# Altium PCB main.PcbDoc
Units mil, origin at the board's own origin, x right, y up, seen from the top; angles counter-clockwise.
Board outline 2845.7 x 1927.04 mil, 2 copper layers (Top Layer, Bottom Layer); 12 components, 7 nets, 37 pads, 138 vias.
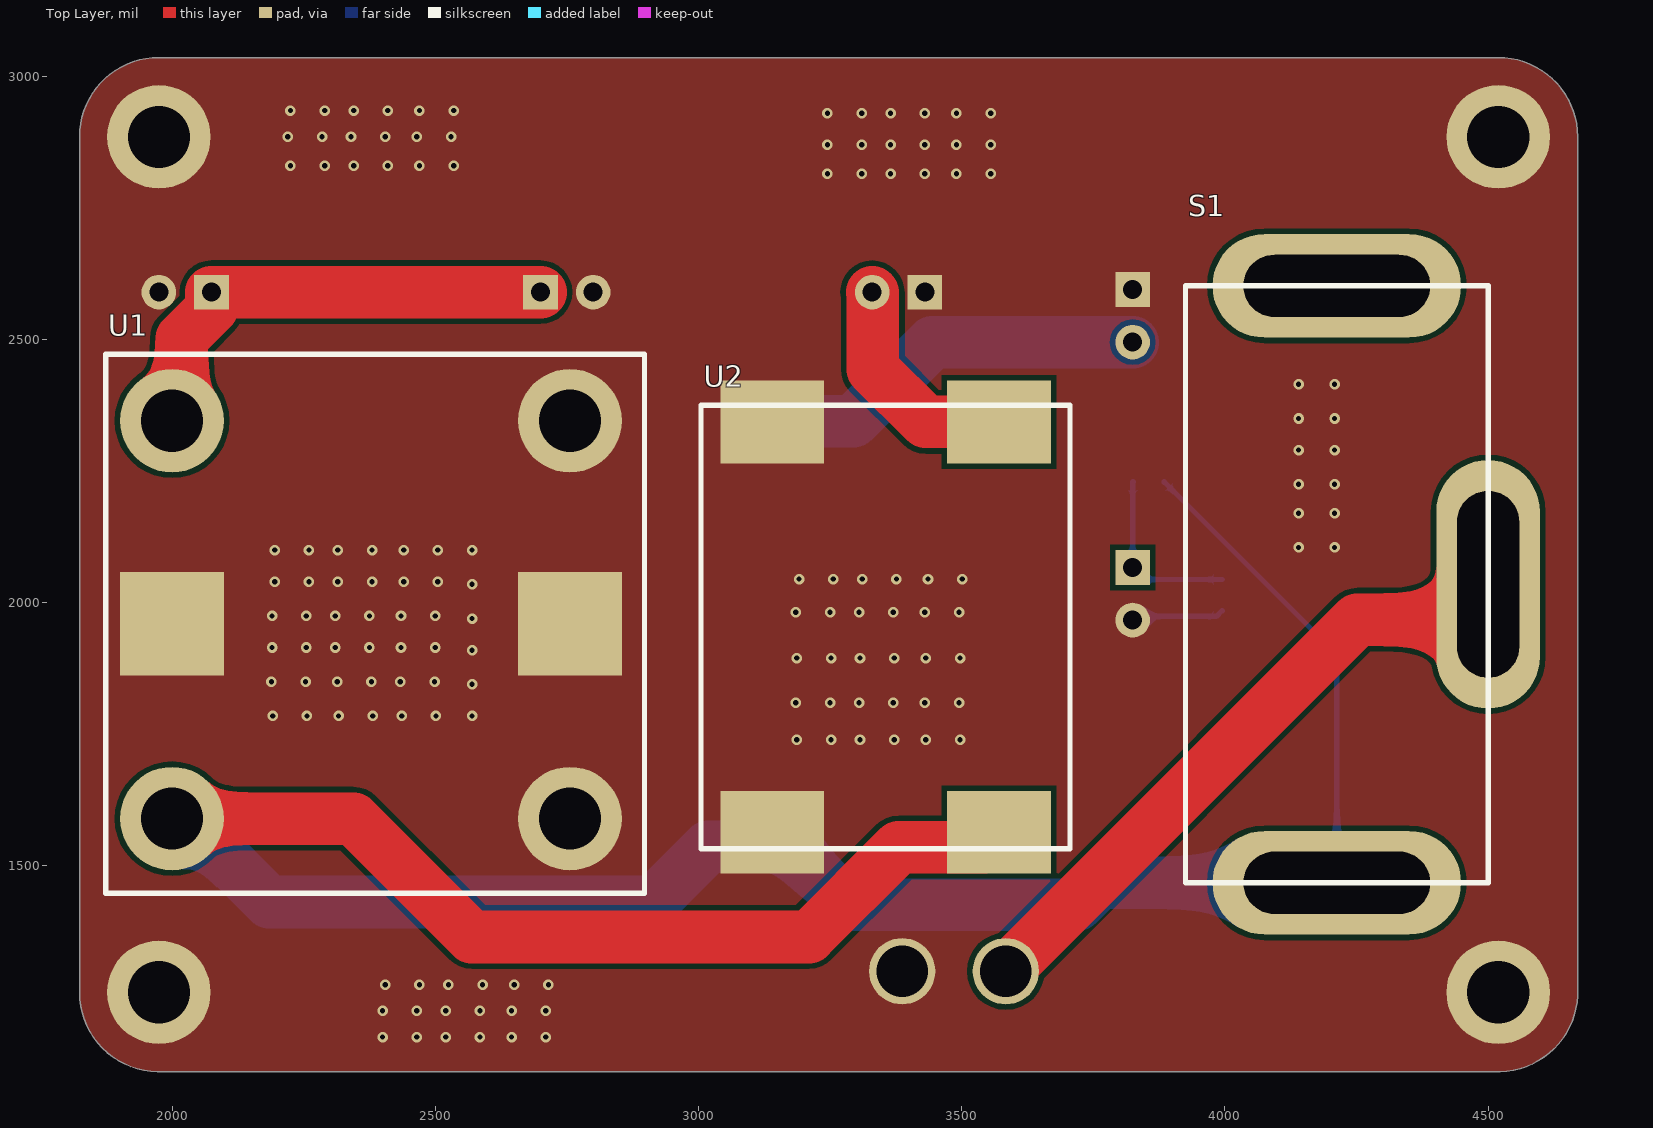
[diagram p0: Top Layer view]
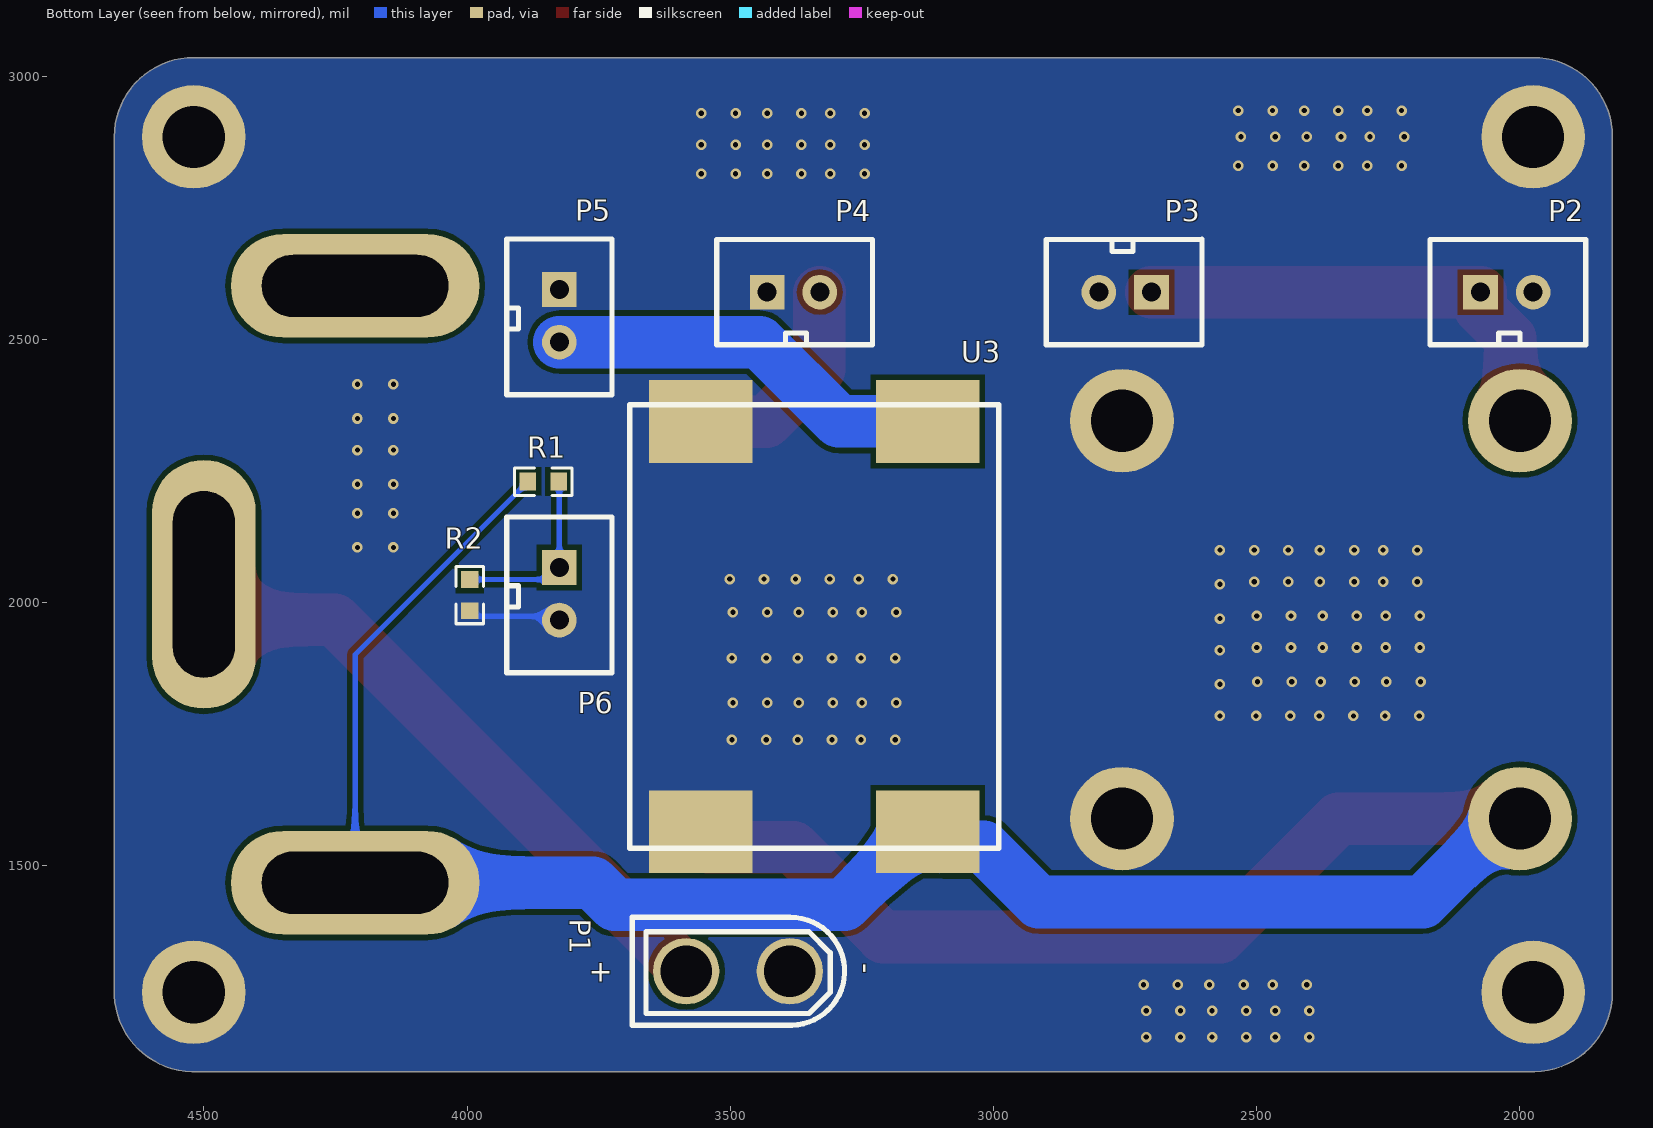
[diagram p1: Bottom Layer view, seen from below]

## Layer stack, top to bottom
Top Solder: solder mask 0.4, Solder Resist, Dk 3.5
Top Layer: signal copper 1.4
Dielectric 1: dielectric 12.6, FR-4, Dk 4.8
Bottom Layer: signal copper 1.4
Bottom Solder: solder mask 0.4, Solder Resist, Dk 3.5

## Board outline
1824.32,1260 cw(c1829.33,1260) 1824.98,1262.5 1824.98,2882.5 cw(c1829.33,2885) 1824.32,2885 cw(c1975,2885) 1975,3035.68 cw(c1975,3030.67) 1975.05,3035.68 4519.33,3035.68 cw(c4519.33,2885) 4670.02,2885 cw(c4665,2885) 4670.01,2884.95 4670.02,1260 cw(c4665,1260) 4670.02,1260 cw(c4519.33,1260) 4670.02,1259.98 4670.02,1255 cw(c4665,1255) 4669.89,1253.89 cw(c4519.33,1260) 4522.99,1109.36 cw(c4520.41,1113.66) 4520.41,1108.65 1975,1108.65 cw(c1975,1113.67) 1972.47,1109.34 cw(c1975,1260)

## Design rules (kind name [scope] priority, off if disabled: settings)
Clearance [All] p1: gap=10 ignorepadtopadclearanceinfootprint=FALSE except(0: Arc-Hole Track-Hole SMDPad-Hole THPad-Hole Via-Hole Fill-Hole Poly-Hole Region-Hole Text-Hole)
PolygonConnect [All] p1: connectstyle=Direct reliefconductorwidth=10 reliefentries=4 polygonreliefangle="90 Angle" airgapwidth=10
RoutingVias [All] p1: holewidth=28 width=50 viastyle="Through Hole" minholewidth=28 minwidth=50 maxholewidth=28 maxwidth=50
SolderMaskExpansion [All] p1: expansion=4
Width [All] p1: maxlimit=100 minlimit=10 preferedwidth=60
30 further rules are at their usual default settings.

## Components (designator, comment, footprint, x,y, rotation, side; value= is the part's Value field where it differs from the comment)
P1 "Header 2" CONN-TH_XT30UPB-M 3465,1300 r0 bottom
P2 "Header 2" XH2.54-2A 2022.95,2589.8 r180 bottom
P3 "Header 2" XH2.54-2A 2752.05,2590.2 r0 bottom
P4 "Header 2" XH2.54-2A 3377.95,2589.8 r180 bottom
P5 "Header 2" XH2.54-2A 3825,2542.95 r270 bottom
P6 "Header 2" XH2.54-2A 3825,2015 r270 bottom
R1 "Res1" R0603 3819.33,2224.13 r0 bottom value=300K
R2 "Res1" R0603 4000.87,1978.64 r90 bottom value=100K
S1 "SW-SPDT" switch 4500,2601.93 r270 top
U1 "5V" 5V_8A 2000,2345.83 r0 top
U2 "7.4V" PCBComponent_1 3005,2375 r0 top
U3 "9V" PCBComponent_1 3690.94,2376.02 r180 bottom

## Footprints (in the part's own frame and the unit in brackets; to place one, negate y for a bottom-side part, rotate by r counter-clockwise, add the part's x,y. Pads: shape width x height; smd on the part's side, far side on the other; paste and mask are expansions set on the pad)
5V_8A [mm]
  round 5 hole 3: 0(0,-19.2) 1(19.2,-19.2) 2(0,0) 3(19.2,0)
  rect 5x5 smd: 4(0,-9.8) 5(19.2,-9.8)
  silkscreen extent -3.2,-22.8 22.8,3.2
CONN-TH_XT30UPB-M [mm]
  round 3.2 hole 2.5: 1(-1.982,0) 2(3.018,0)
  silkscreen extent -4.63,-2.6 5.62,2.6
PCBComponent_1 [mm]
  rect 5x4 smd: 0(14.375,-20.6) 1(3.425,-20.6) 2(14.375,-0.8) 3(3.425,-0.8)
  silkscreen extent 0,-21.4 17.8,0
R0603 [mil]
  rect 31.75x34.02 smd: 1(6.36,-5.87) 2(65.67,-5.87)
  silkscreen extent -19,-32 91,20
switch [mm]
  oval 5x12 hole 3 slot 9 at 90 deg: 1(0,-7.3) 3(28.8,-7.3)
  oval 12x5 hole 3 slot 9 at 0 deg: 2(14.4,0)
  silkscreen extent 0,-14.6 28.8,0
XH2.54-2A [mil]
  rect 66x66 hole 36: 1(-52.05,0.2)
  round 66 hole 36: 2(47.95,0.2)
  silkscreen extent -148,-100 148,100

## Part data
P1 P2 P3 P4 P5 P6: "Header, 2-Pin", LatestRevisionDate=17-Jul-2002, LatestRevisionNote="Re-released for DXP Platform.", Publisher="Altium Limited"
R1 R2: "Resistor", LatestRevisionDate=17-Jul-2002, LatestRevisionNote="Re-released for DXP Platform.", PackageDescription="Axial Device, Thru-Hole; 2 Leads; 0.3 in Pin Spacing", PackageReference=AXIAL-0.3, Published=8-Jun-2000, Publisher="Altium Limited"
S1: "SPDT Subminiature Toggle Switch, Right Angle Mounting, Vertical Actuation", ComponentLink1Description="Manufacturer Link", ComponentLink1URL=http://www.apem.com, DatasheetVersion=05-Dec-2000, LatestRevisionDate=17-Dec-2003, LatestRevisionNote="Schematic revised, PCB Footprint replaced.", PackageDescription="Switch; 4 Leads", PackageReference=TL36WW15050, Published=24-Mar-1999, Publisher="Altium Limited"
U1: library part 5V_8A
U2: library part 7_4V

## Free pads (board coordinates)
  round 196.85 hole 118.11: 0(1975,2885) 1(4519.33,2885) 2(1975,1260) 3(4519.33,1260)

## Via types
v1: diameter 20, hole 10, Top Layer to Bottom Layer, 138 vias

## Nets (pads, with @x,y where several pads share a name; then routed paths per layer and width w, separated by ;. In a path a pad name is that pad's centre, name@x,y a point inside that pad or via, vN(x,y) a via of type N, cw(c..) or ccw(c..) an arc to the next point about the centre after c; other vN are vias at no path point)
5V: P2.1 P3.1 U1.2 | length 900.2
  Top Layer w100: U1.2 2018.53,2364.36 2018.53,2502.01 2075,2558.48 P2.1 P3.1
7V4: P4.2 U2.2 | length 428
  Top Layer w100: P4.2 3331.15,2588.85 3331.15,2443.85 3431.5,2343.5 U2.2
9V: P5.2 U3.2 | length 762.1
  Bottom Layer w100: U3.2 3294.08,2344.53 3444.56,2495 P5.2
12V: R1.2 S1.3 U1.0 U2.0 U3.0 | length 5052.5
  Top Layer w100: U1.0 2344.65,1589.92 2569.58,1365 3210,1365 3380.24,1535.24 3542.2,1535.24 U2.0
  Bottom Layer w10: R1.2 3885,2228.87 4212.6,1901.27 S1.3
  Bottom Layer w100: U1.0 2026.21,1589.92 2184.63,1431.5 2914.33,1431.5 3019.09,1536.26 3096.26,1536.26 U3.0 3144.68,1565 3283.43,1426.26 3719.8,1426.26 3761.62,1468.07 S1.3
12V_IN: P1.2 S1.2 | length 1233.8
  Top Layer w100: P1.2 4251.57,1967.76 4455.26,1967.76 4500,2012.5 S1.2
GND: P1.1 P2.2 P3.2 P4.1 P5.1 P6.2 pad.0 pad.1 pad.2 pad.3 R2.1 U1.1 U1.3 U1.4 U1.5 U2.1 U2.3 U3.1 U3.3 | length 177.6
  Bottom Layer w10: P6.2 3831.87,1974.12 3984.12,1974.12 R2.1
  other v1: 2400,1175 2465,1175 2520,1175 2585,1175 2645,1175 2710,1175 2400,1225 2465,1225 2520,1225 2585,1225 2645,1225 2710,1225 2405,1274.24 2470,1274.24 2525,1274.24 2590,1274.24 2650,1274.24 2715,1274.24 3186.87,1740 3251.87,1740 3306.87,1740 3371.87,1740 3431.87,1740 3496.87,1740 2191.35,1785 2256.35,1785 2316.35,1785 2381.35,1785 2436.35,1785 2501.35,1785 2570,1785 3185,1810 3250,1810 3305,1810 3370,1810 3430,1810 3495,1810 2570,1845 2188.76,1850 2253.76,1850 2313.76,1850 2378.76,1850 2433.76,1850 2498.76,1850 3186.87,1895 3251.87,1895 3306.87,1895 3371.87,1895 3431.87,1895 3496.87,1895 2570,1910 2190,1915 2255,1915 2310,1915 2375,1915 2435,1915 2500,1915 2570,1970 2190,1975 2255,1975 2310,1975 2375,1975 2435,1975 2500,1975 3185,1982.05 3250,1982.05 3305,1982.05 3370,1982.05 3430,1982.05 3495,1982.05 2570,2035 2195,2040 2260,2040 2315,2040 2380,2040 2440,2040 2505,2040 3191.05,2045 3256.05,2045 3311.05,2045 3376.05,2045 3436.05,2045 3501.05,2045 2195,2100 2260,2100 2315,2100 2380,2100 2440,2100 2505,2100 2570,2100 4140,2105 4208.41,2105 4140,2170 4208.41,2170 4140,2225 4208.41,2225 4140,2290 4208.41,2290 4140,2350 4208.41,2350 4140,2415 4208.41,2415 3245,2815 3310,2815 3365,2815 3430,2815 3490,2815 3555,2815 2225,2830 2290,2830 2345,2830 2410,2830 2470,2830 2535,2830 3245,2870 3310,2870 3365,2870 3430,2870 3490,2870 3555,2870 2220,2885 2285,2885 2340,2885 2405,2885 2465,2885 2530,2885 3245,2930 3310,2930 3365,2930 3430,2930 3490,2930 3555,2930 2225,2935 2290,2935 2345,2935 2410,2935 2470,2935 2535,2935
NetP6_1: P6.1 R1.1 R2.2 | length 342.9
  Bottom Layer w10: R1.1 3824.8,2229.11 P6.1 3847.54,2044.31 R2.2
pads on no net: S1.1

## Polygon pours and split planes (outlines as drawn)
GND on Bottom Layer "GND_L02_P002" (solid, remove dead copper, pour order 2): 1824.32,1260 cw(c1829.33,1260) 1824.98,1262.5 1824.98,2882.5 cw(c1829.33,2885) 1824.32,2885 cw(c1975,2885) 1975,3035.68 cw(c1975,3030.67) 1975.05,3035.68 4519.33,3035.68 cw(c4519.33,2885) 4670.02,2885 cw(c4665,2885) 4670.01,2884.95 4670.02,1260 cw(c4665,1260) 4670.02,1260 cw(c4519.33,1260) 4670.02,1259.98 4670.02,1255 cw(c4665,1255) 4669.89,1253.89 cw(c4519.33,1260) 4522.99,1109.36 cw(c4520.41,1113.66) 4520.41,1108.65 1975,1108.65 cw(c1975,1113.67) 1972.47,1109.34 cw(c1975,1260)
GND on Top Layer "GND_L01_P000" (solid, remove dead copper, pour order 0): 1824.32,1260 cw(c1829.33,1260) 1824.98,1262.5 1824.98,2882.5 cw(c1829.33,2885) 1824.32,2885 cw(c1975,2885) 1975,3035.68 cw(c1975,3030.67) 1975.05,3035.68 4519.33,3035.68 cw(c4519.33,2885) 4670.02,2885 cw(c4665,2885) 4670.01,2884.95 4670.02,1260 cw(c4665,1260) 4670.02,1260 cw(c4519.33,1260) 4670.02,1259.98 4670.02,1255 cw(c4665,1255) 4669.89,1253.89 cw(c4519.33,1260) 4522.99,1109.36 cw(c4520.41,1113.66) 4520.41,1108.65 1975,1108.65 cw(c1975,1113.67) 1972.47,1109.34 cw(c1975,1260)

## Other copper
Bottom Layer:
  region: 3080,2305
  region: 4225,1480

## Silkscreen, mask and mechanical layers (free items; w line width, h text height)
Mechanical 1:
  lines w10: 4519.33,3035.68 cw(c4519.33,2885) 4670.02,2885 cw(c4665,2885) 4670.01,2884.95 4670.02,1260 ; 4519.33,3035.68 4519.33,3035.68 ; 4519.33,3035.68 1975.05,3035.68 ccw(c1975,3030.67) 1975,3035.68 ccw(c1975,2885) 1824.32,2885 ccw(c1829.33,2885) 1824.98,2882.5 1824.98,1262.5 ccw(c1829.33,1260) 1824.32,1260 ccw(c1975,1260) 1972.47,1109.34 ccw(c1975,1113.67) 1975,1108.65 4520.41,1108.65 ccw(c4520.41,1113.66) 4522.99,1109.36 ccw(c4519.33,1260) 4669.89,1253.89 ; 4669.89,1253.89 ccw(c4665,1255) 4670.02,1255 4670.02,1259.98 ; 4669.89,1253.89 4669.89,1253.89 ; 4670.01,1259.98 ccw(c4519.33,1260) 4670.02,1260 ; 4670.02,1260 ccw(c4665,1260) 4670.01,1260

## Text inside footprints (layer, text, board x,y; h text height)
P1: Bottom Overlay "+" at 3723.81,1314.99 h39.37 r180; Bottom Overlay "-" at 3260.07,1314.99 h39.37 r90